# Altium PCB Camera_Ribbon.PcbDoc
Units mm, origin at the board's own origin, x right, y up, seen from the top; angles counter-clockwise.
Board outline 22.32 x 155.77 mm, 2 copper layers (Top Layer, Bottom Layer), stack 0.272 mm thick; 2 components, 24 nets, 48 pads, 0 vias.
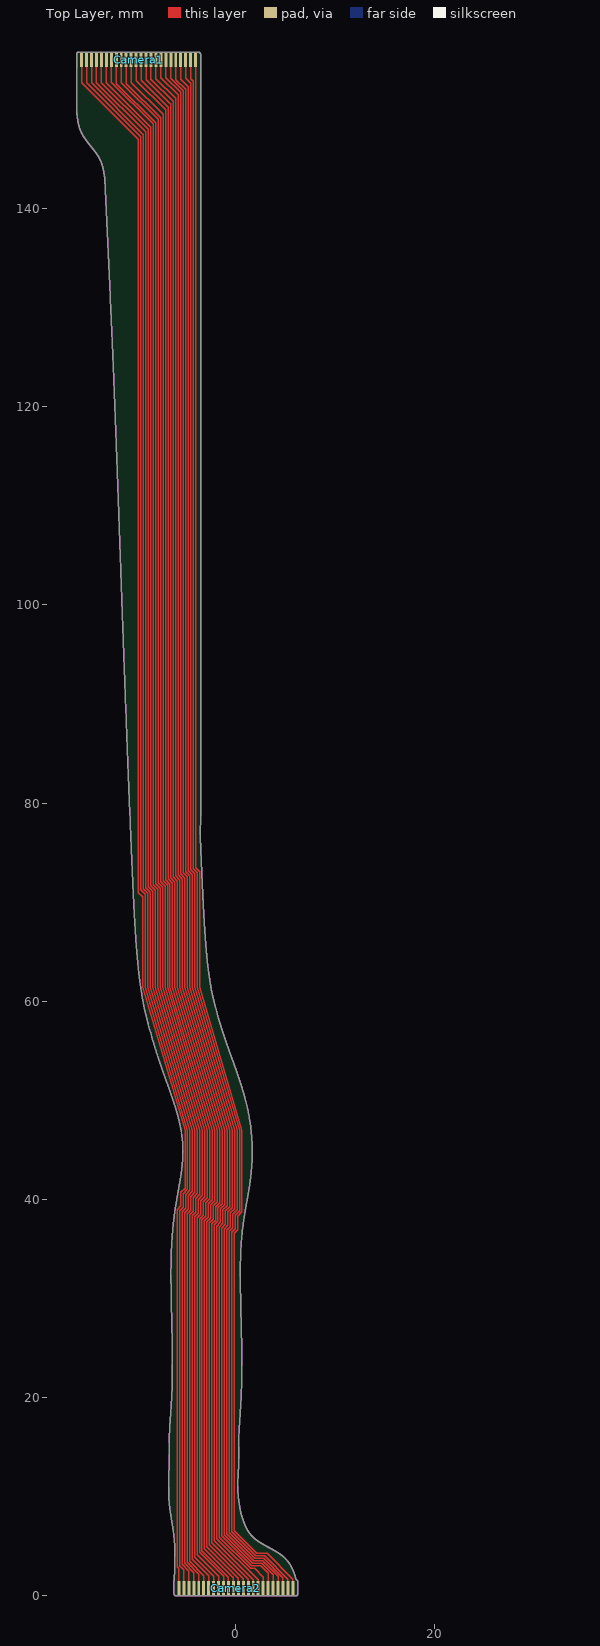
[diagram p0: Top Layer view]
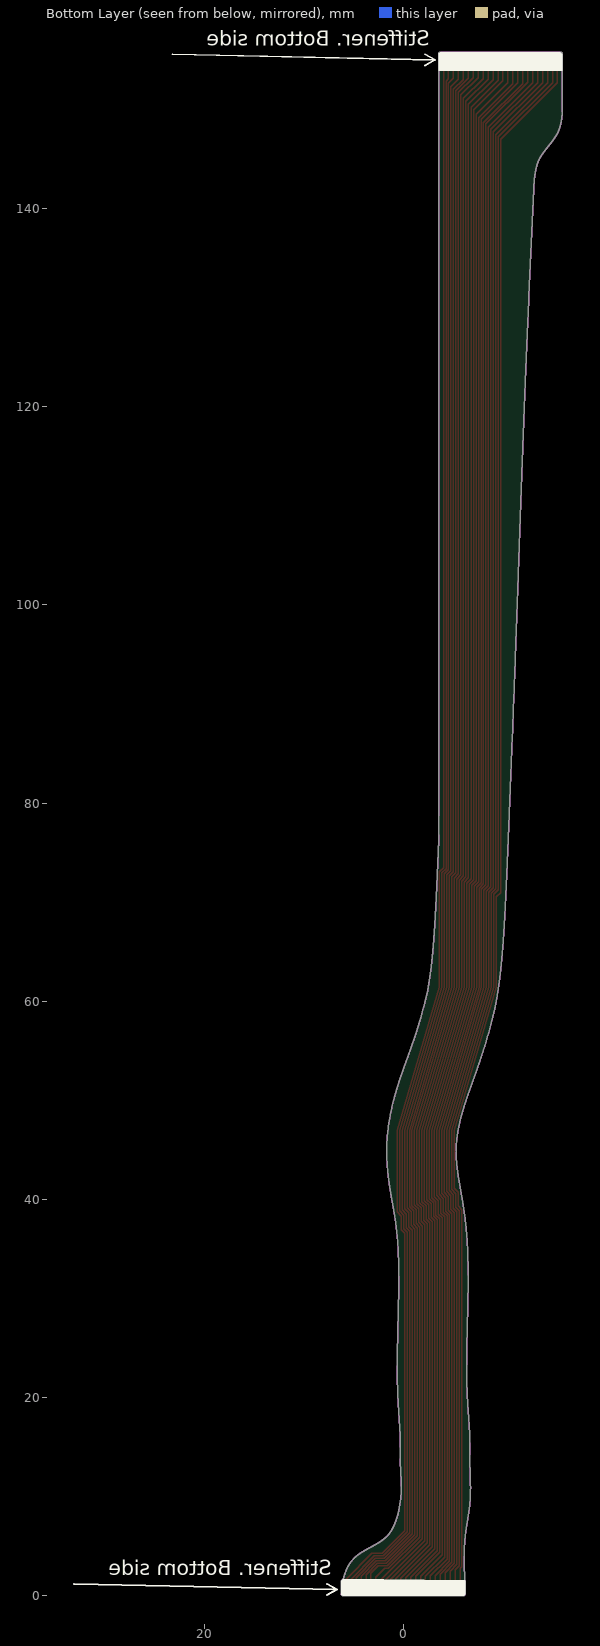
[diagram p1: Bottom Layer view, seen from below]

## Layer stack, top to bottom
Top Solder: solder mask 0.01, Solder Resist, Dk 3.5
Top Layer: signal copper 0.036
Dielectric 1: core 0.2, FR-4, Dk 4.6
Bottom Layer: signal copper 0.036
Bottom Solder: solder mask 0.01, Solder Resist, Dk 3.5

## Board outline
4237 vertices, not listed, extent -16.071,0 6.25,155.771

## Design rules (kind name [scope] priority, off if disabled: settings)
Clearance Clearance_keep [IsPad or IsRegion vs OnLayer('Keep-Out Layer')] p1: gap=0 ignorepadtopadclearanceinfootprint=FALSE except(0.15: Arc-Poly Track-Poly SMDPad-Poly THPad-Poly Via-Poly Fill-Poly Poly-Poly Poly-Region)
Clearance [All] p2: gap=0.1 ignorepadtopadclearanceinfootprint=FALSE
ComponentClearance [All] p1 off: gap=0.254 collisioncheckmode=3 verticalgap=0.254 showdistances=FALSE
DiffPairsRouting [All] p1: maxlimit=0.15 minlimit=0.15 mostfreqgap=0.15 toplayer_minwidth=0.25 toplayer_maxwidth=0.25 toplayer_prefwidth=0.25 bottomlayer_minwidth=0.25 bottomlayer_maxwidth=0.25 bottomlayer_prefwidth=0.25 maxuncoupledlength=12.7
Height [All] p1 off: minheight=0 maxheight=25.4 prefheight=12.7
HoleSize [All] p1 off: absolutevalues=TRUE maxlimit=5 minlimit=0.1 maxpercent=80.000 minpercent=20.000
HoleToHoleClearance [All] p1: gap=0.2 allowstackedmicrovias=TRUE
MinimumSolderMaskSliver [All] p1 off: minsoldermaskwidth=0.051
PasteMaskExpansion [All] p1 off: expansion=0
PlaneClearance [All] p1: clearance=0.15
PlaneConnect [All] p1: planeconnectstyle=Direct reliefexpansion=0.5 reliefentries=4 reliefconductorwidth=0.5 reliefairgap=0.5
PolygonConnect [All] p1: thpad.connectstyle=Direct thpad.reliefconductorwidth=0.4 thpad.reliefentries=4 thpad.polygonreliefangle="90 Angle" thpad.airgapwidth=0.3 smdpad.connectstyle=Relief smdpad.reliefconductorwidth=0.15 smdpad.reliefentries=4 smdpad.polygonreliefangle="90 Angle" smdpad.airgapwidth=0.2 via.connectstyle=Direct via.reliefconductorwidth=0.4 via.reliefentries=4 via.polygonreliefangle="90 Angle" via.airgapwidth=0.3
RoutingVias [All] p1: holewidth=0.5 width=1 viastyle="Through Hole" minholewidth=0.2 minwidth=0.5 maxholewidth=0.5 maxwidth=1
ShortCircuit ShortCircuit_LEDs [HasFootprint('KPTR-3216QBC-D') vs HasFootprint('KPTR-3216QBC-D')] p1: allowed=TRUE
ShortCircuit ShortCircuit_LEDs_1 [IsTrack vs HasFootprint('KPTR-3216QBC-D')] p2: allowed=TRUE
ShortCircuit [All] p3: allowed=FALSE
SilkToBoardRegionClearance [All] p1 off:
SilkToSilkClearance [All] p1 off: silktosilkclearance=0.254
SilkToSolderMaskClearance SilkToViaClearance [IsVia] p1 off: minsilkscreentomaskgap=0.102 clearancetoexposedcopper=TRUE
SilkToSolderMaskClearance SilkscreenOverComponentPads [IsPad] p2 off: minsilkscreentomaskgap=0.051 clearancetoexposedcopper=TRUE
SolderMaskExpansion [All] p1: expansion=0.05
Width [All] p1: maxlimit=1.2 minlimit=0.125 preferedwidth=0.2
17 further rules are at their usual default settings.

## Components (designator, comment, footprint, x,y, rotation, side; value= is the part's Value field where it differs from the comment)
Camera1 "AYF-532435" FPC-SMD_24P-P0.50_L6.4-W15.1 -9.821,156.771 r180 top
Camera2 "AYF-532435" FPC-SMD_24P-P0.50_L6.4-W15.1 0,-1 r0 top

## Footprints (in the part's own frame and the unit in brackets; to place one, negate y for a bottom-side part, rotate by r counter-clockwise, add the part's x,y. Pads: shape width x height; smd on the part's side, far side on the other; paste and mask are expansions set on the pad)
FPC-SMD_24P-P0.50_L6.4-W15.1 [mm]
  rect 0.3x1.5 smd: 1(-5.75,1.75) 2(-5.25,1.75) 3(-4.75,1.75) 4(-4.25,1.75) 5(-3.75,1.75) 6(-3.25,1.75) 7(-2.75,1.75) 8(-2.25,1.75) 9(-1.75,1.75) 10(-1.25,1.75) 11(-0.75,1.75) 12(-0.25,1.75) 13(0.25,1.75) 14(0.75,1.75) 15(1.25,1.75) 16(1.75,1.75) 17(2.25,1.75) 18(2.75,1.75) 19(3.25,1.75) 20(3.75,1.75) 21(4.25,1.75) 22(4.75,1.75) 23(5.25,1.75) 24(5.75,1.75)

## Part data
Camera1 Camera2: "Connector", Manufacturer_Name=Panasonic, Datasheet Link=https://www.panasonic-electric-works.com/pew/eu/downloads/ds_y5b_y5bw_en.pdf, Height=1mm, Manufacturer_Part_Number=AYF-532435

## Nets (pads, with @x,y where several pads share a name; then routed paths per layer and width w, separated by ;. In a path a pad name is that pad's centre, name@x,y a point inside that pad or via, vN(x,y) a via of type N, cw(c..) or ccw(c..) an arc to the next point about the centre after c; other vN are vias at no path point)
NetCamera1_1: Camera1.1 Camera2.24 | length 158.4
  Top Layer w0.135: Camera1.1 -4.071,73.474 -3.653,73.056 -3.653,61.412 0.612,46.996 0.612,38.742 0.19,38.32 0.19,36.956 -0.173,36.593 -0.173,6.573 2.119,4.281 3.153,4.281 5.75,1.684 Camera2.24
NetCamera1_2: Camera1.2 Camera2.23 | length 158.4
  Top Layer w0.135: Camera1.2 -4.571,153.106 -4.321,152.856 -4.321,73.37 -3.903,72.952 -3.903,61.412 0.362,46.996 0.362,38.845 -0.06,38.423 -0.06,37.059 -0.423,36.696 -0.423,6.47 2.015,4.031 2.912,4.031 5.25,1.694 Camera2.23
NetCamera1_3: Camera1.3 Camera2.22 | length 158.4
  Top Layer w0.135: Camera1.3 -5.071,153.124 -4.571,152.624 -4.571,73.267 -4.153,72.849 -4.153,61.412 0.112,46.996 0.112,38.949 -0.31,38.527 -0.31,37.163 -0.673,36.8 -0.673,6.366 1.912,3.781 2.803,3.781 4.75,1.834 Camera2.22
NetCamera1_4: Camera1.4 Camera2.21 | length 158.4
  Top Layer w0.135: Camera1.4 -5.571,153.024 -4.821,152.274 -4.821,73.163 -4.403,72.745 -4.403,61.412 -0.138,46.996 -0.138,39.052 -0.56,38.631 -0.56,37.266 -0.923,36.903 -0.923,6.263 1.808,3.531 2.699,3.531 4.25,1.981 Camera2.21
NetCamera1_5: Camera1.5 Camera2.20 | length 158.4
  Top Layer w0.135: Camera1.5 -6.071,153.006 -5.071,152.006 -5.071,73.06 -4.653,72.642 -4.653,61.412 -0.388,46.996 -0.388,39.156 -0.81,38.734 -0.81,37.37 -1.173,37.007 -1.173,6.159 1.705,3.281 2.596,3.281 3.75,2.127 Camera2.20
NetCamera1_6: Camera1.6 Camera2.19 | length 158.4
  Top Layer w0.135: Camera1.6 -6.571,153.138 -5.321,151.888 -5.321,72.956 -4.903,72.538 -4.903,61.412 -0.638,46.996 -0.638,39.26 -1.06,38.838 -1.06,37.474 -1.423,37.111 -1.423,6.056 1.601,3.031 2.492,3.031 3.25,2.274 Camera2.19
NetCamera1_7: Camera1.7 Camera2.18 | length 158.1
  Top Layer w0.135: Camera1.7 -7.071,153.206 -5.571,151.706 -5.571,72.852 -5.153,72.435 -5.153,61.412 -0.888,46.996 -0.888,39.363 -1.31,38.941 -1.31,37.577 -1.673,37.214 -1.673,5.917 1.487,2.756 1.881,2.756 2.75,1.887 Camera2.18
NetCamera1_8: Camera1.8 Camera2.17 | length 157.8
  Top Layer w0.135: Camera1.8 -7.571,153.206 -5.821,151.456 -5.821,72.749 -5.403,72.331 -5.403,61.412 -1.138,46.996 -1.138,39.467 -1.56,39.045 -1.56,37.681 -1.923,37.318 -1.923,5.778 2.25,1.605 Camera2.17
NetCamera1_9: Camera1.9 Camera2.16 | length 157.8
  Top Layer w0.135: Camera1.9 -8.071,153.106 -6.071,151.106 -6.071,72.645 -5.653,72.227 -5.653,61.412 -1.388,46.996 -1.388,39.57 -1.81,39.148 -1.81,37.784 -2.173,37.421 -2.173,5.568 1.75,1.645 Camera2.16
NetCamera1_10: Camera1.10 Camera2.15 | length 157.8
  Top Layer w0.135: Camera1.10 -8.571,153.045 -6.321,150.795 -6.321,72.542 -5.903,72.124 -5.903,61.412 -1.638,46.996 -1.638,39.674 -2.06,39.252 -2.06,37.888 -2.423,37.525 -2.423,5.352 -1.926,4.855 -1.919,4.855 1.25,1.685 Camera2.15
NetCamera1_11: Camera1.11 Camera2.14 | length 157.8
  Top Layer w0.135: Camera1.11 -9.071,153.006 -6.571,150.506 -6.571,72.438 -6.153,72.02 -6.153,61.412 -1.888,46.996 -1.888,39.777 -2.31,39.355 -2.31,37.991 -2.673,37.628 -2.673,5.149 0.75,1.726 Camera2.14
NetCamera1_12: Camera1.12 Camera2.13 | length 157.8
  Top Layer w0.135: Camera1.12 -9.571,152.956 -6.853,150.238 -6.853,72.367 -6.403,71.917 -6.403,61.412 -2.138,46.996 -2.138,39.881 -2.56,39.459 -2.56,38.095 -2.923,37.732 -2.923,4.934 -2.475,4.485 -2.469,4.485 0.25,1.766 Camera2.13
NetCamera1_13: Camera1.13 Camera2.12 | length 157.8
  Top Layer w0.135: Camera1.13 -10.071,152.906 -7.103,149.938 -7.103,72.263 -6.653,71.813 -6.653,61.412 -2.388,46.996 -2.388,39.984 -2.81,39.563 -2.81,38.198 -3.173,37.835 -3.173,4.73 -0.25,1.806 Camera2.12
NetCamera1_14: Camera1.14 Camera2.11 | length 157.8
  Top Layer w0.135: Camera1.14 -10.571,152.706 -7.353,149.488 -7.353,72.16 -6.903,71.71 -6.903,61.412 -2.638,46.996 -2.638,40.088 -3.06,39.666 -3.06,38.302 -3.423,37.939 -3.423,4.57 -0.75,1.897 Camera2.11
NetCamera1_15: Camera1.15 Camera2.10 | length 157.8
  Top Layer w0.135: Camera1.15 -11.071,152.606 -7.603,149.138 -7.603,72.056 -7.153,71.606 -7.153,61.412 -2.888,46.996 -2.888,40.192 -3.31,39.77 -3.31,38.406 -3.673,38.043 -3.673,4.416 -1.25,1.993 Camera2.10
NetCamera1_16: Camera1.16 Camera2.9 | length 157.8
  Top Layer w0.135: Camera1.16 -11.571,152.706 -7.853,148.988 -7.853,71.953 -7.403,71.503 -7.403,61.412 -3.138,46.996 -3.138,40.295 -3.56,39.873 -3.56,38.509 -3.923,38.146 -3.923,4.163 -1.75,1.99 Camera2.9
NetCamera1_17: Camera1.17 Camera2.8 | length 157.8
  Top Layer w0.135: Camera1.17 -12.071,152.606 -8.103,148.638 -8.103,71.849 -7.653,71.399 -7.653,61.412 -3.388,46.996 -3.388,40.399 -3.81,39.977 -3.81,38.613 -4.173,38.25 -4.173,3.891 -2.25,1.968 Camera2.8
NetCamera1_18: Camera1.18 Camera2.7 | length 157.8
  Top Layer w0.135: Camera1.18 -12.571,152.753 -8.353,148.535 -8.353,71.745 -7.903,71.295 -7.903,61.412 -3.638,46.996 -3.638,40.502 -4.06,40.08 -4.06,38.716 -4.423,38.353 -4.423,3.682 -2.75,2.009 Camera2.7
NetCamera1_19: Camera1.19 Camera2.6 | length 157.8
  Top Layer w0.135: Camera1.19 -13.071,152.668 -8.603,148.201 -8.603,71.642 -8.153,71.192 -8.153,61.412 -3.888,46.996 -3.888,40.606 -4.31,40.184 -4.31,38.82 -4.673,38.457 -4.673,3.472 -3.25,2.049 Camera2.6
NetCamera1_20: Camera1.20 Camera2.5 | length 157.8
  Top Layer w0.135: Camera1.20 -13.571,152.712 -8.853,147.994 -8.853,71.538 -8.403,71.088 -8.403,61.412 -4.138,46.996 -4.138,40.709 -4.56,40.287 -4.56,38.923 -4.923,38.56 -4.923,3.368 -3.75,2.195 Camera2.5
NetCamera1_21: Camera1.21 Camera2.4 | length 157.8
  Top Layer w0.135: Camera1.21 -14.071,152.697 -9.103,147.73 -9.103,71.435 -8.653,70.985 -8.653,61.412 -4.388,46.996 -4.388,40.813 -4.81,40.391 -4.81,39.027 -5.173,38.664 -5.173,3.265 -4.25,2.342 Camera2.4
NetCamera1_22: Camera1.22 Camera2.3 | length 157.8
  Top Layer w0.135: Camera1.22 -14.571,152.672 -9.353,147.454 -9.353,71.331 -8.903,70.881 -8.903,61.412 -4.638,46.996 -4.638,40.916 -5.06,40.494 -5.06,39.13 -5.423,38.767 -5.423,3.161 -4.75,2.488 Camera2.3
NetCamera1_23: Camera1.23 Camera2.2 | length 157.8
  Top Layer w0.135: Camera1.23 -15.071,152.708 -9.603,147.24 -9.603,71.228 -9.153,70.778 -9.153,61.412 -4.888,46.996 ; Camera2.2 -5.25,2.635 -5.673,3.058 -5.673,38.871 -5.31,39.234 -5.31,40.598 -4.888,41.02 -4.888,46.996
NetCamera1_24: Camera1.24 Camera2.1 | length 157.8
  Top Layer w0.135: Camera1.24 -15.571,152.692 -9.853,146.974 -9.853,70.97 -9.403,70.52 -9.403,61.412 -5.138,46.996 -5.138,41.124 -5.56,40.702 -5.56,39.337 -5.923,38.974 -5.923,38.957 -5.923,2.954 -5.75,2.781 Camera2.1

## Keep-outs
Keep-Out Layer:
  drawing of 4524 lines, arcs and shapes, not listed

## Silkscreen, mask and mechanical layers (free items; w line width, h text height)
Bottom Overlay:
  region: -3.747,155.77 -3.571,155.644 -3.571,153.9 -16.071,153.9 -16.071,155.57 -15.871,155.77
  region: -6,0 -6.1,0 -6.207,0.076 -6.25,0.2 -6.25,1.502 -6.217,1.564 6.04,1.71 6.25,1.5 6.25,0.126 6.124,0
  lines w0.2: -2.2,154.426 -3.2,155 ; -2.2,155.563 -3.2,155 ; 7.7,0.076 6.7,0.65 ; 7.7,1.213 6.7,0.65 ; 23.3,155.563 -3.2,155 ; 33.2,1.213 6.7,0.65
  text "Stiffener. Bottom side" at -2.7,156.415 h1.52
  text "Stiffener. Bottom side" at 7.2,2.065 h1.52